# Altium PCB 6C-2L-1550um.PcbDoc
Units mm, origin at the board's own origin, x right, y up, seen from the top; angles counter-clockwise.
Board outline 35 x 35 mm, 2 copper layers (Top Layer, Bottom Layer), stack 1.586 mm thick; 16 components, 21 nets, 68 pads, 16 vias.
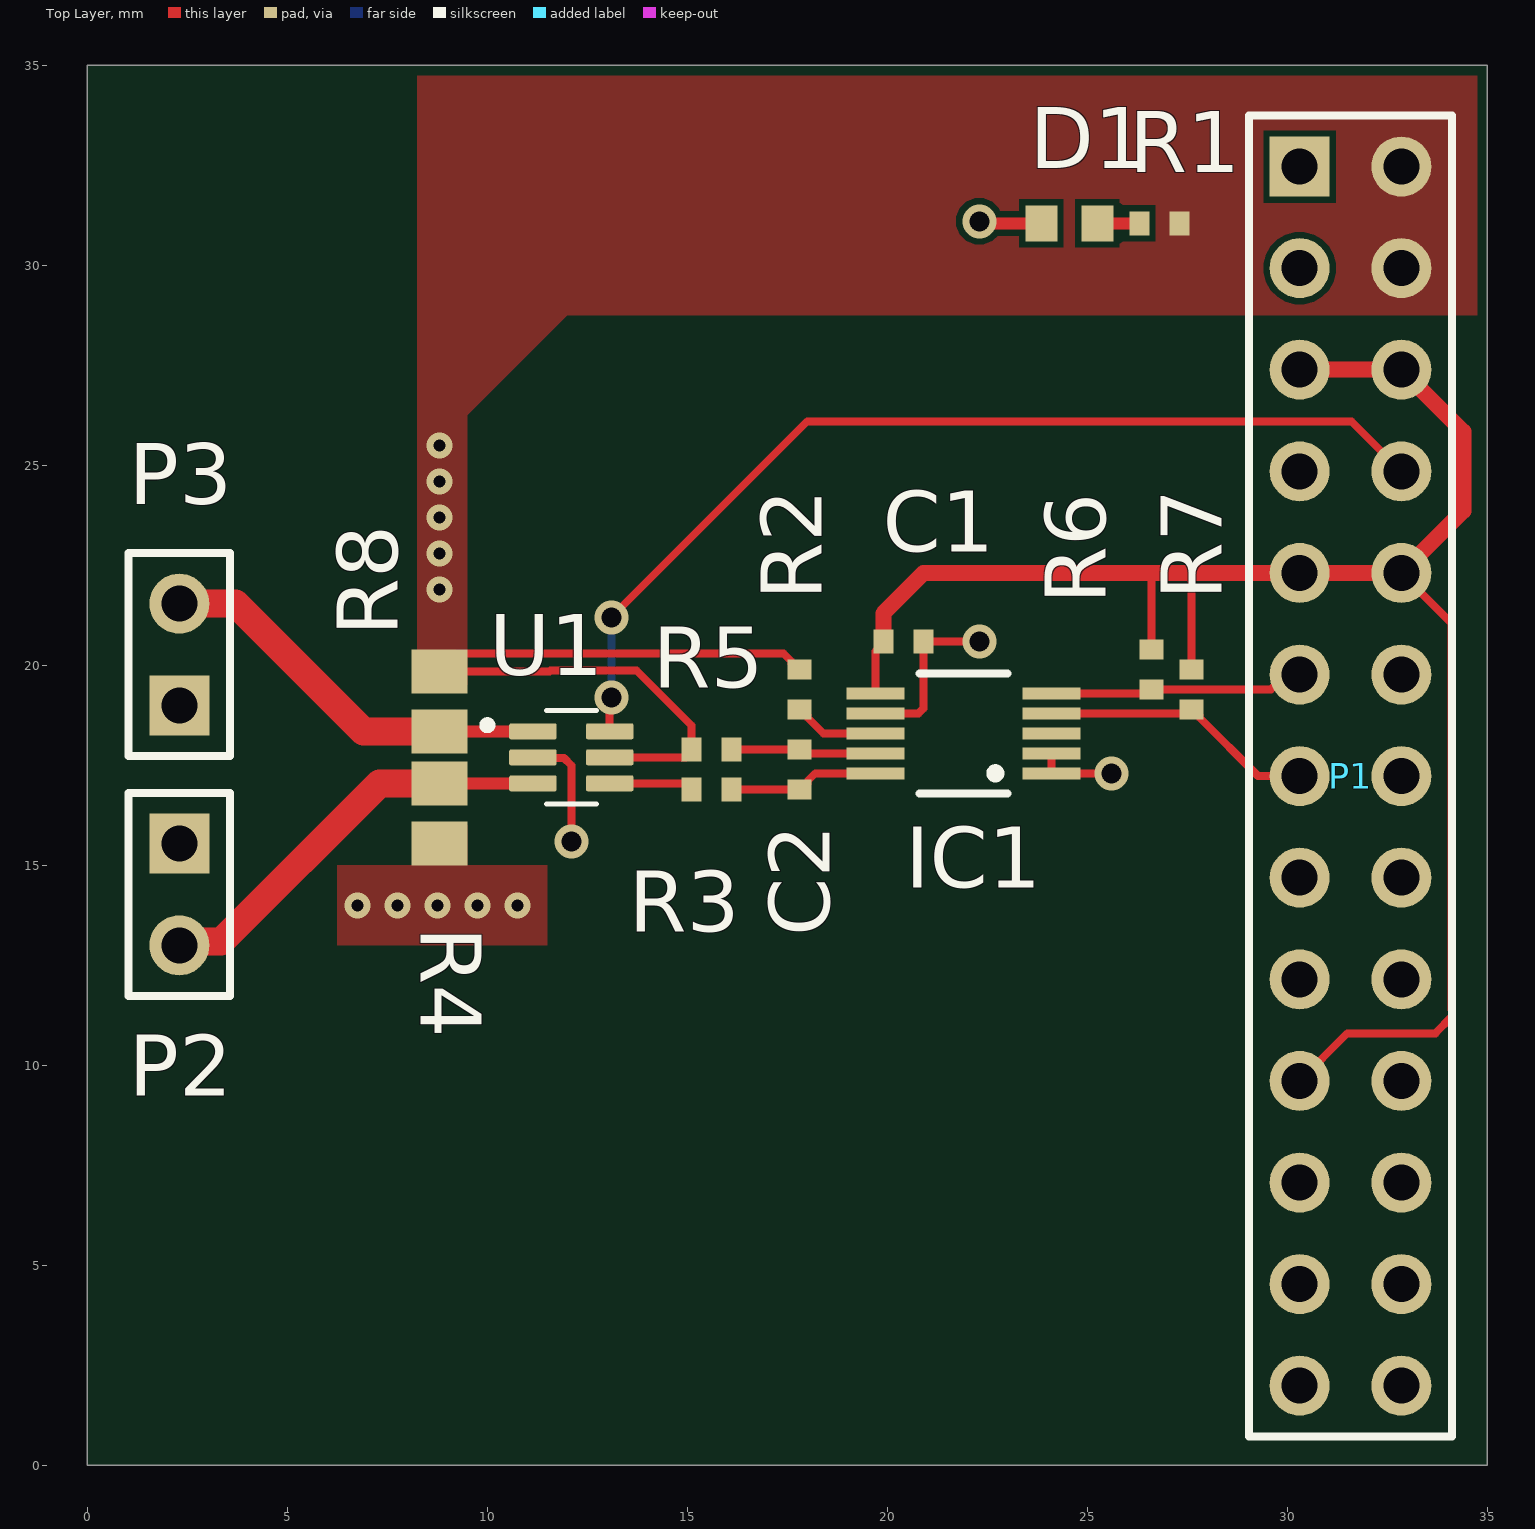
[diagram p0: Top Layer view]
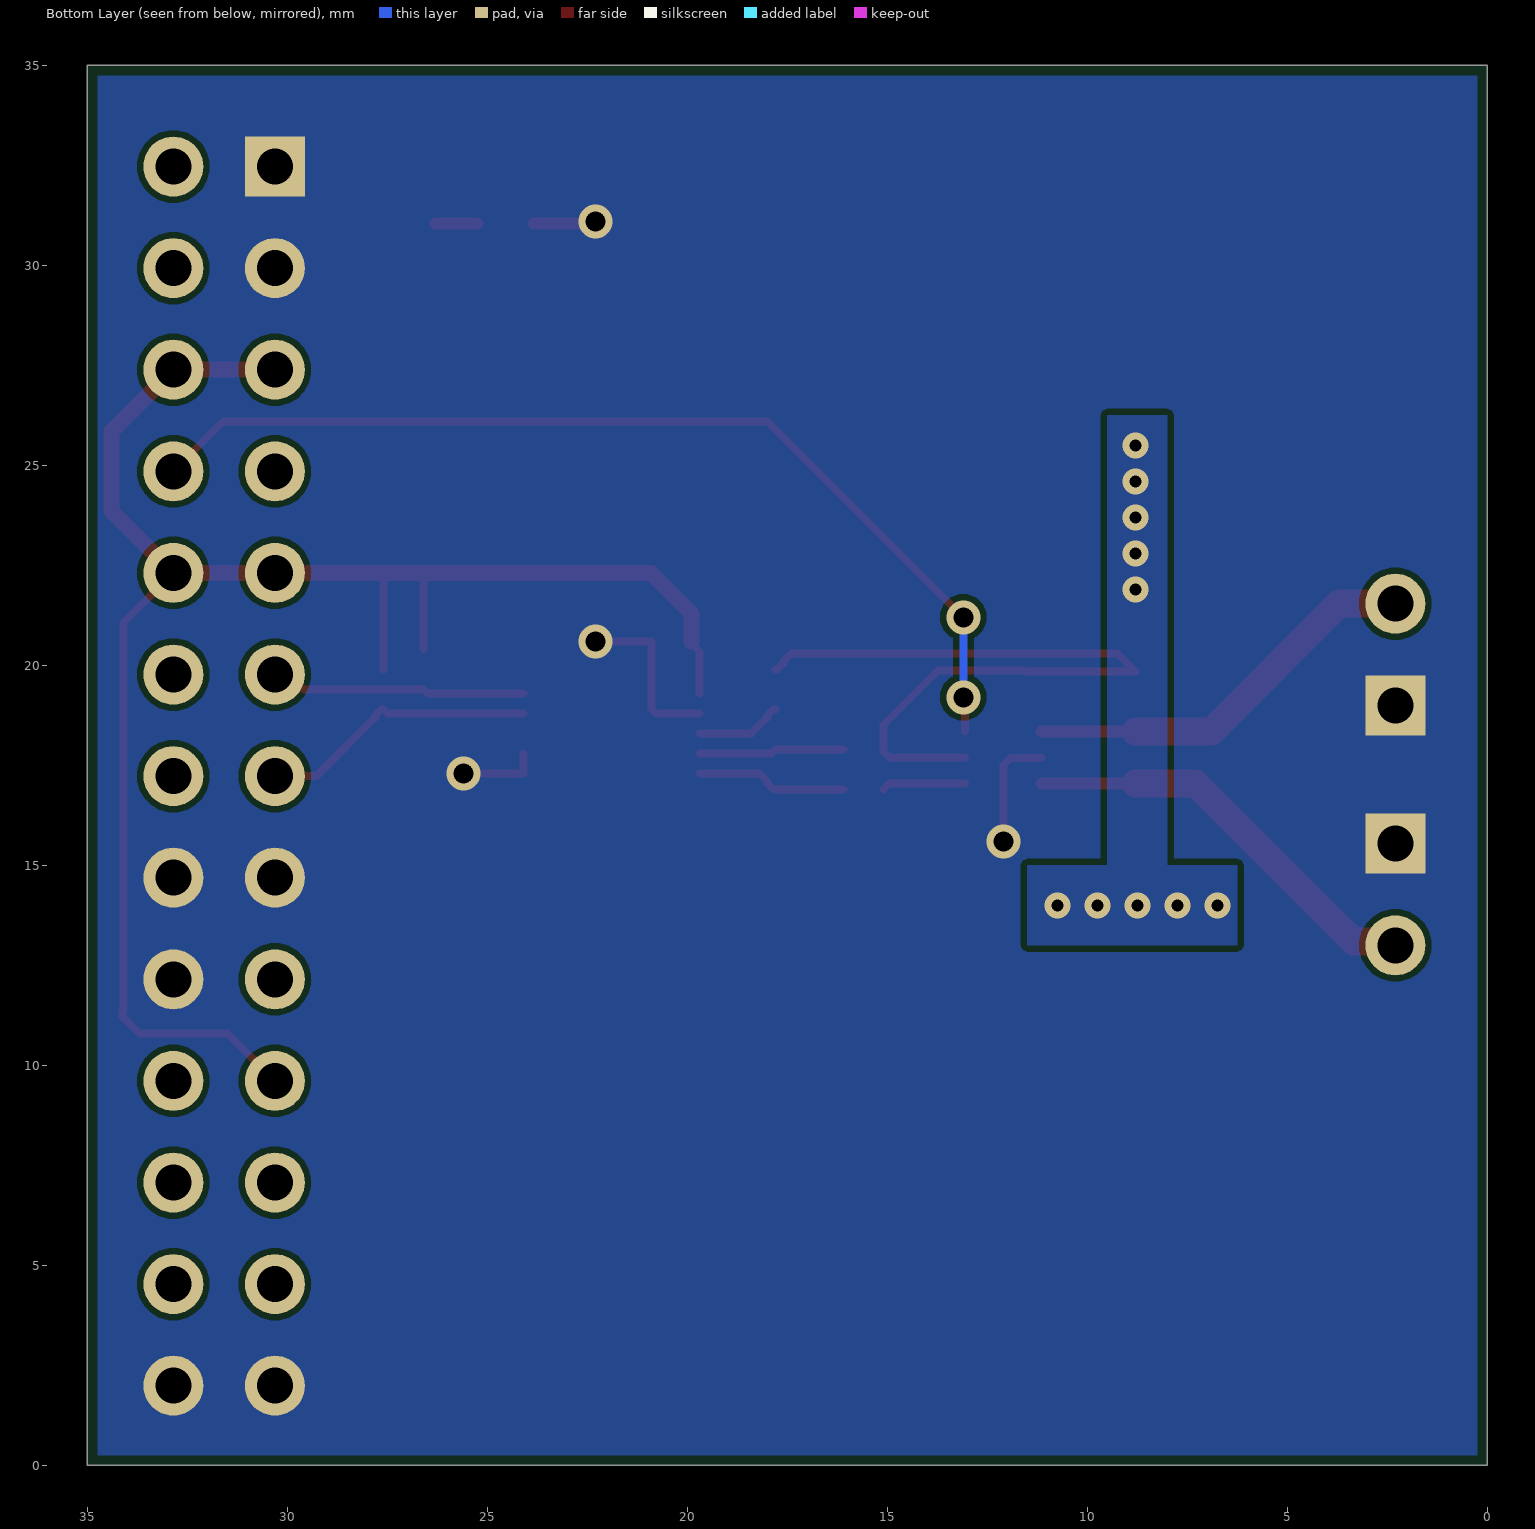
[diagram p1: Bottom Layer view, seen from below]
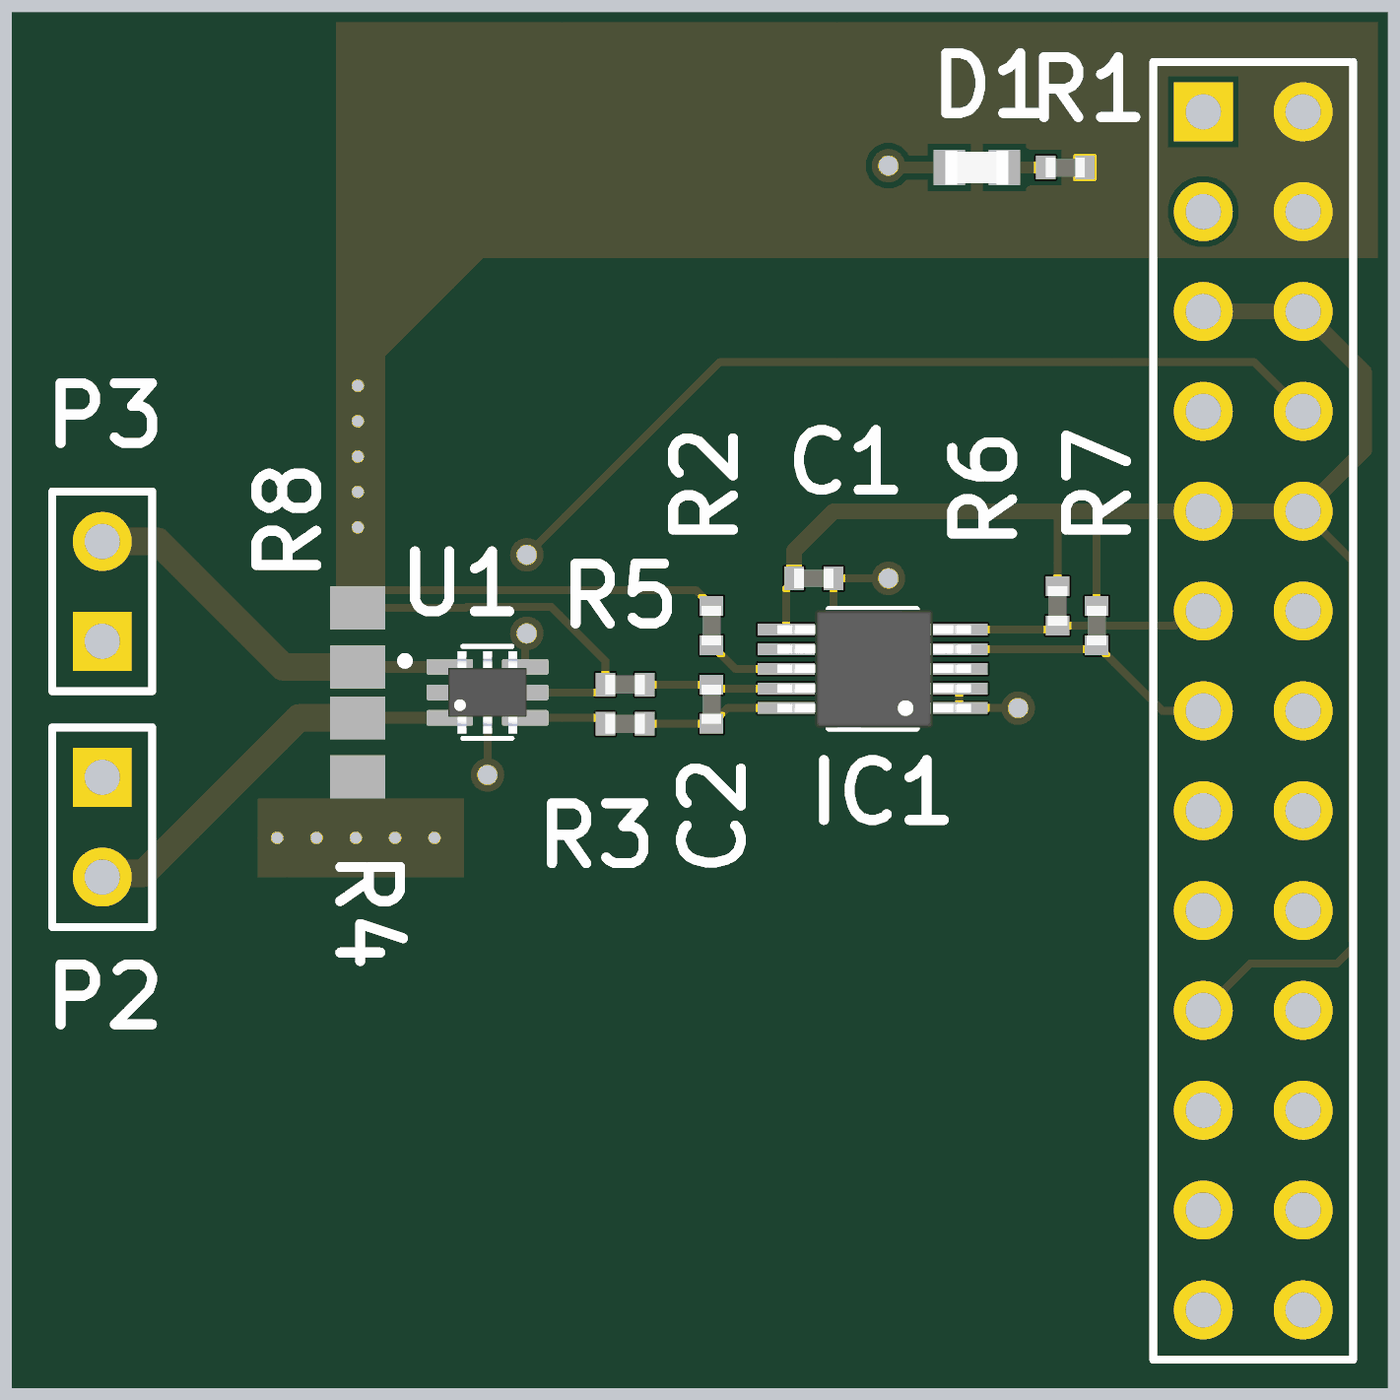
[diagram p2: 3D render of the assembled board from above, using the file's embedded part models]

## Layer stack, top to bottom
Top Solder: solder mask 0.0102, Solder Resist, Dk 3.5
Top Layer: signal copper 0.018
Dielectric1: core 1.55, FR-4, Dk 4.8
Bottom Layer: signal copper 0.018
Bottom Solder: solder mask 0.0102, Solder Resist, Dk 3.5

## Board outline
0,0 0,35 35,35 35,0

## Design rules (kind name [scope] priority, off if disabled: settings)
BoardOutlineClearance [All] p1: gap=0.25 ignorepadtopadclearanceinfootprint=FALSE except(0: Arc-SplitContinuation Track-SplitContinuation SMDPad-SplitContinuation THPad-SplitContinuation Via-SplitContinuation Fill-SplitContinuation Poly-SplitContinuation Region-SplitContinuation Text-SplitContinuation)
Clearance Clearance-xPP-xTP-xTT [All] p1: gap=0.15 ignorepadtopadclearanceinfootprint=FALSE except(0: Arc-Hole Track-Hole SMDPad-Hole THPad-Hole Via-Hole Fill-Hole Poly-Hole Region-Hole Text-Hole)
ComponentClearance [All] p1: gap=0.25 collisioncheckmode=3 verticalgap=0.25 showdistances=FALSE
DiffPairsRouting [All] p1: maxlimit=0.25 minlimit=0.25 mostfreqgap=0.25 toplayer_minwidth=0.381 toplayer_maxwidth=0.381 toplayer_prefwidth=0.381 bottomlayer_minwidth=0.381 bottomlayer_maxwidth=0.381 bottomlayer_prefwidth=0.381 maxuncoupledlength=12.5
Height [All] p1: minheight=0 maxheight=25 prefheight=12.5
HoleSize HoleSize-PTH [All] p1: absolutevalues=TRUE maxlimit=2 minlimit=0.25 maxpercent=80.000 minpercent=20.000
HoleToHoleClearance [All] p1: gap=0.35 allowstackedmicrovias=TRUE
MinimumAnnularRing "Minimum IAR  >0.45mm" [((ObjectKind = 'Pad') OR (ObjectKind = 'Via')) And (Layer = 'MultiLayer') And (HoleDiameter > AsMM(0.45))] p1: minimumring=0.175 // minimum inner annular ring for pads > 0.45mm finished hole size
MinimumAnnularRing "Minimum IAR <=0.45mm" [((ObjectKind = 'Pad') OR (ObjectKind = 'Via')) And (Layer = 'MultiLayer') And (HoleDiameter <= AsMM(0.45))] p2: minimumring=0.175 // minimum inner annular ring for pads <= 0.45mm finished hole size
MinimumSolderMaskSliver [All] p1: minsoldermaskwidth=0.08
PlaneClearance PlaneClearance-IPI [All] p1: clearance=0.25
PlaneConnect [All] p1: planeconnectstyle=Relief reliefexpansion=0.175 reliefentries=4 reliefconductorwidth=0.2 reliefairgap=0.2
PolygonConnect PolygonConnect-xTW [All] p1: connectstyle=Direct reliefconductorwidth=0.2 reliefentries=4 polygonreliefangle="90 Angle" airgapwidth=0.2
RoutingCorners [All] p1: cornerstyle=45-Degree minsetback=2.5 maxsetback=2.5
RoutingVias "RoutingVias > 0.45mm" [(ObjectKind = 'Via') And (HoleDiameter > AsMM(0.45))] p1: holewidth=0.5 width=0.85 viastyle="Through Hole" minholewidth=0.5 minwidth=0.85 maxholewidth=0.9 maxwidth=1.25 // finishet hole size > 0.45mm
RoutingVias "RoutingVias <= 0.45mm" [(ObjectKind = 'Via') And (HoleDiameter <= AsMM(0.45))] p2: holewidth=0.3 width=0.65 viastyle="Through Hole" minholewidth=0.25 minwidth=0.6 maxholewidth=0.45 maxwidth=0.8 // finishet hole size <= 0.45mm
SilkToSilkClearance [All] p1: silktosilkclearance=0.2
SilkToSolderMaskClearance SilkscreenOverComponentPads [IsPad] p1: minsilkscreentomaskgap=0.2 clearancetoexposedcopper=TRUE
SolderMaskExpansion [All] p1: expansion=0 istentingtop=FALSE
UnRoutedNet [All] p1: checkbadconnections=TRUE
Width Width-xTW [All] p1: maxlimit=1.5 minlimit=0.15 preferedwidth=0.2
18 further rules are at their usual default settings.

## Components (designator, comment, footprint, x,y, rotation, side; value= is the part's Value field where it differs from the comment)
C1 "Cap_0402" 0402 20.4,20.6 r180 top value=100nF
C2 "Cap_0402" 0402 17.8,17.4 r270 top value=100nF
D1 "LED0" 0603 24.55,31.05 r0 top
IC1 "INA226" VSSOP-10 24.1,17.3 r180 top
P1 "Header 13X2" HDR2X13 30.31,32.47 r270 top
P2 "Header 2" HDR1X2 2.3,15.54 r270 top
P3 "Header 2" HDR1X2 2.3,19 r90 top
R1 "Res_0402" 0402 26.8,31.05 r0 top value=1K
R2 "Res_0402" 0402 17.8,19.4 r90 top value=10
R3 "Res_0402" 0402 15.6,16.9 r180 top value=5.1
R4 "Res_0805" 0805 8.8,16.3 r90 top value=2
R5 "Res_0402" 0402 15.6,17.9 r180 top value=5.1
R6 "Res_0402" 0402 26.6,19.9 r90 top value=4.7K
R7 "Res_0402" 0402 27.6,19.4 r90 top value=4.7K
R8 "Res_0805" 0805 8.8,19.1 r270 top value=2
U1 "SN74LVC1G3157DCKR" SOT65P210X110-6N 12.1,17.7 r0 top

## Footprints (in the part's own frame and the unit in brackets; to place one, negate y for a bottom-side part, rotate by r counter-clockwise, add the part's x,y. Pads: shape width x height; smd on the part's side, far side on the other; paste and mask are expansions set on the pad)
0402 [mm]
  rect 0.5x0.6 smd mask+0.05: 1(-0.5,0) 2(0.5,0)
  body extent -0.5,-0.25 0.5,0.25, height 0.25
0603 [mm] "0603 footprint"
  rect 0.8x0.9 smd: 1(-0.7,0) 2(0.7,0)
  body extent -0.8,-0.43 0.8,0.43, height 0.48
0805 [mm] "Chip Capacitor, Body 2.0x1.3mm, IPC High Density"
  rect 1.1x1.4 smd: 1(-0.75,0) 2(0.75,0)
  body extent -1.1,-0.72 1.1,0.72, height 1.4
HDR1X2 [mm] "Connector; Header; 2 Position"
  rect 1.5x1.5 hole 0.9: 1(0,0)
  round 1.5 hole 0.9: 2(2.54,0)
  silkscreen extent -1.27,-1.27 3.81,1.27
HDR2X13 [mm] "Connector; Header; 13x2 Position"
  rect 1.5x1.5 hole 0.9: 1(0,0)
  round 1.5 hole 0.9: 2(0,2.54) 3(2.54,0) 4(2.54,2.54) 5(5.08,0) 6(5.08,2.54) 7(7.62,0) 8(7.62,2.54) 9(10.16,0) 10(10.16,2.54) 11(12.7,0) 12(12.7,2.54) 13(15.24,0) 14(15.24,2.54) 15(17.78,0) 16(17.78,2.54) 17(20.32,0) 18(20.32,2.54) 19(22.86,0) 20(22.86,2.54) 21(25.4,0) 22(25.4,2.54) 23(27.94,0) 24(27.94,2.54) 25(30.48,0) 26(30.48,2.54)
  silkscreen extent -1.27,-1.27 31.75,3.81
SOT65P210X110-6N [mm]
  rrect25% 1.19x0.4 smd: 1(-0.96,0.65) 2(-0.96,0) 3(-0.96,-0.65) 4(0.96,-0.65) 5(0.96,0) 6(0.96,0.65)
  silkscreen extent -2.2,-1.17 0.63,1.17, body extent -1,-1.05 1,1.05, height 1.1
VSSOP-10 [mm]
  rect 1.45x0.3 smd mask+0.05: 1(0,0) 2(0,-0.5) 3(0,-1) 4(0,-1.5) 5(0,-2) 6(4.4,-2) 7(4.4,-1.5) 8(4.4,-1) 9(4.4,-0.5) 10(4.4,0)
  silkscreen extent 1.1,-2.5 3.3,0.5, body extent -0.3,-2.5 4.63,0.5, height 1.1

## Part data
C1 C2: "Capacitor", LatestRevisionDate=17-Jul-2002, LatestRevisionNote="Re-released for DXP Platform.", PackageDescription="Radial Cap, Thru-Hole; 2 Leads; 0.3 in Pin Spacing", PackageReference=RAD-0.3, Published=8-Jun-2000, Publisher="Altium Limited"
D1: "Typical INFRARED GaAs LED", LatestRevisionDate=08-Jul-2005, LatestRevisionNote="Mech Layer 1 removed.", PackageDescription="LED; 2 Leads", PackageReference=LED-0, Published=8-Jun-2000, Publisher="Altium Limited"
IC1: "Bi-Directional Current and Power Monitor"
P1: "Header, 13-Pin, Dual row", LatestRevisionDate=17-Jul-2002, LatestRevisionNote="Re-released for DXP Platform.", Publisher="Altium Limited"
P2 P3: "Header, 2-Pin", LatestRevisionDate=17-Jul-2002, LatestRevisionNote="Re-released for DXP Platform.", Publisher="Altium Limited"
R1 R2 R3 R4 R5 R6 R7 R8: "Resistor", LatestRevisionDate=17-Jul-2002, LatestRevisionNote="Re-released for DXP Platform.", PackageDescription="Axial Device, Thru-Hole; 2 Leads; 0.4 in Pin Spacing", PackageReference=AXIAL-0.4, Published=8-Jun-2000, Publisher="Altium Limited"
U1: "5 Vï¼Œ2ï¼š1ï¼ˆSPDTï¼‰ï¼Œ1é€šé“é€šç”¨æ¨¡æ“¬é–‹é—œ6-SC70 -40è‡³125", Package="SOT-SC70-6 Texas Instruments", Availability=Good, Check_prices=https://www.snapeda.com/parts/SN74LVC1G3157DCKR/Texas%20Instruments/view-part/270736/?ref=eda, MF="Texas Instruments", MP=SN74LVC1G3157DCKR, Price=None, Purchase-URL=https://pricing.snapeda.com/search/part/SN74LVC1G3157DCKR/?ref=eda, SnapEDA_Link=https://www.snapeda.com/parts/SN74LVC1G3157DCKR/Texas%20Instruments/view-part/270736/?ref=snap

## Via types
v1: diameter 0.65, hole 0.3, Top Layer to Bottom Layer, tented both sides, 10 vias
v2: diameter 0.85, hole 0.5, Top Layer to Bottom Layer, tented both sides, 6 vias

## Nets (pads, with @x,y where several pads share a name; then routed paths per layer and width w, separated by ;. In a path a pad name is that pad's centre, name@x,y a point inside that pad or via, vN(x,y) a via of type N, cw(c..) or ccw(c..) an arc to the next point about the centre after c; other vN are vias at no path point)
+3V: C1.2 IC1.6 P1.5 P1.6 P1.9 P1.10 P1.19 R6.2 R7.2 | length 44.8
  Top Layer w0.2: IC1.6 19.7,20.35 19.9,20.55 C1.2 ; R6.2 26.6,22.31 ; R7.2 27.6,22.31 ; P1.19 31.5,10.8 33.7,10.8 34.117,11.217 34.117,11.383 34.1,11.4 34.1,21.06 P1.10
  Top Layer w0.4: C1.2 19.9,21.3 20.91,22.31 26.6,22.31 27.6,22.31 P1.9 P1.10 34.4,23.86 34.4,25.84 P1.6 P1.5
Drain: P3.2 R8.2 U1.1 | length 10.2
  Top Layer w0.3: R8.2 U1.1
  Top Layer w0.7: P3.2 3.71,21.54 6.9,18.35 R8.2
Gain: P2.2 R4.2 U1.3 | length 10.5
  Top Layer w0.3: R4.2 U1.3
  Top Layer w0.7: P2.2 2.398,13.098 3.348,13.098 7.3,17.05 R4.2
GND: C1.1 D1.1 IC1.1 IC1.2 IC1.7 P1.1 P1.3 P1.15 P1.16 P1.18 P1.25 P1.26 P2.1 P3.1 U1.2 | length 10.8
  Top Layer w0.2: U1.2 11.155,17.685 11.915,17.685 12.1,17.5 v2(12.1,15.6) ; IC1.7 20.783,18.8 20.9,18.917 C1.1 v2(22.3,20.6) ; IC1.2 IC1.1 v2(25.6,17.3)
  Top Layer w0.3: v2(22.3,31.1) 22.35,31.05 D1.1
I2C1_SCL: P1.12
I2C1_SDA: P1.14
I2C3_SCL: IC1.5 P1.11 R6.1 | length 6.4
  Top Layer w0.2: IC1.5 26.5,19.3 R6.1 29.588,19.4 29.958,19.77 P1.11
I2C3_SDA: IC1.4 P1.13 R7.1 | length 7
  Top Layer w0.2: IC1.4 27.5,18.8 R7.1 27.65,18.9 27.8,18.75 27.8,18.7 29.27,17.23 P1.13
NetC2_1: C2.1 IC1.9 R5.1 | length 3.6
  Top Layer w0.2: R5.1 C2.1 17.9,17.8 IC1.9
NetC2_2: C2.2 IC1.10 R3.1 | length 3.8
  Top Layer w0.2: R3.1 C2.2 17.85,16.9 18,17.05 18,17.1 18.2,17.3 IC1.10
NetD1_2: D1.2 R1.1 | length 1.1
  Top Layer w0.3: D1.2 R1.1
NetIC1_8: IC1.8 R2.1 | length 2.2
  Top Layer w0.2: R2.1 17.85,18.9 18,18.75 18,18.7 18.4,18.3 IC1.8
PA0: P1.20
PA1: P1.22
PA2: P1.21
PA3: P1.23
PA4: P1.24
PB5: P1.8 U1.6 | length 25.2
  Top Layer w0.2: U1.6 13.06,19.16 v2(13.1,19.2) ; v2(13.1,21.2) 18,26.1 31.6,26.1 P1.8
  Bottom Layer w0.2: v2(13.1,19.2) v2(13.1,21.2)
PC3: P1.17
Switch: R3.2 U1.4 | length 2.1
  Top Layer w0.2: U1.4 14.95,17.05 R3.2
VBAT: P1.2 P1.4 R1.2 R2.2 R4.1 R5.2 R8.1 U1.5 | length 19
  Top Layer w0.2: U1.5 14.95,17.7 15.1,17.85 R5.2 15.1,18.5 13.725,19.875 11.575,19.875 11.55,19.85 R8.1 9.25,20.3 17.4,20.3 17.6,20.1 17.6,20.05 17.75,19.9 R2.2
  other v1: 6.75,14 7.75,14 8.75,14 9.75,14 10.75,14 8.8,21.9 8.8,22.8 8.8,23.7 8.8,24.6 8.8,25.5
pads on no net: IC1.3 P1.7

## Polygon pours and split planes (outlines as drawn)
VBAT on Bottom Layer "NONET_L-01_P-001" (solid, pour order 0): 9.5,26.25 9.5,15 11.5,15 11.5,13 6.25,13 6.25,15 8,15 8,26.25
GND on Bottom Layer "NONET_L-01_P-001" (solid, pour order 3): 0,35 35,35 35,0 0,0
VBAT on Top Layer "NONET_L-01_P-001" (solid, pour order 2): 8.25,19.5 8.25,36.5 8.75,37 34.25,37 36.25,35 36.25,28.75 12,28.75 9.5,26.25 9.5,19.5
VBAT on Top Layer "NONET_L-01_P-001" (solid, pour order 4): 8.25,16 8.25,15 6.25,15 6.25,13 11.5,13 11.5,15 9.5,15 9.5,16

## Silkscreen, mask and mechanical layers (free items; w line width, h text height)
Dimensions:
  the board outline again, w0.2